# EAGLE board version0.1 (EAGLE 7.3.0)
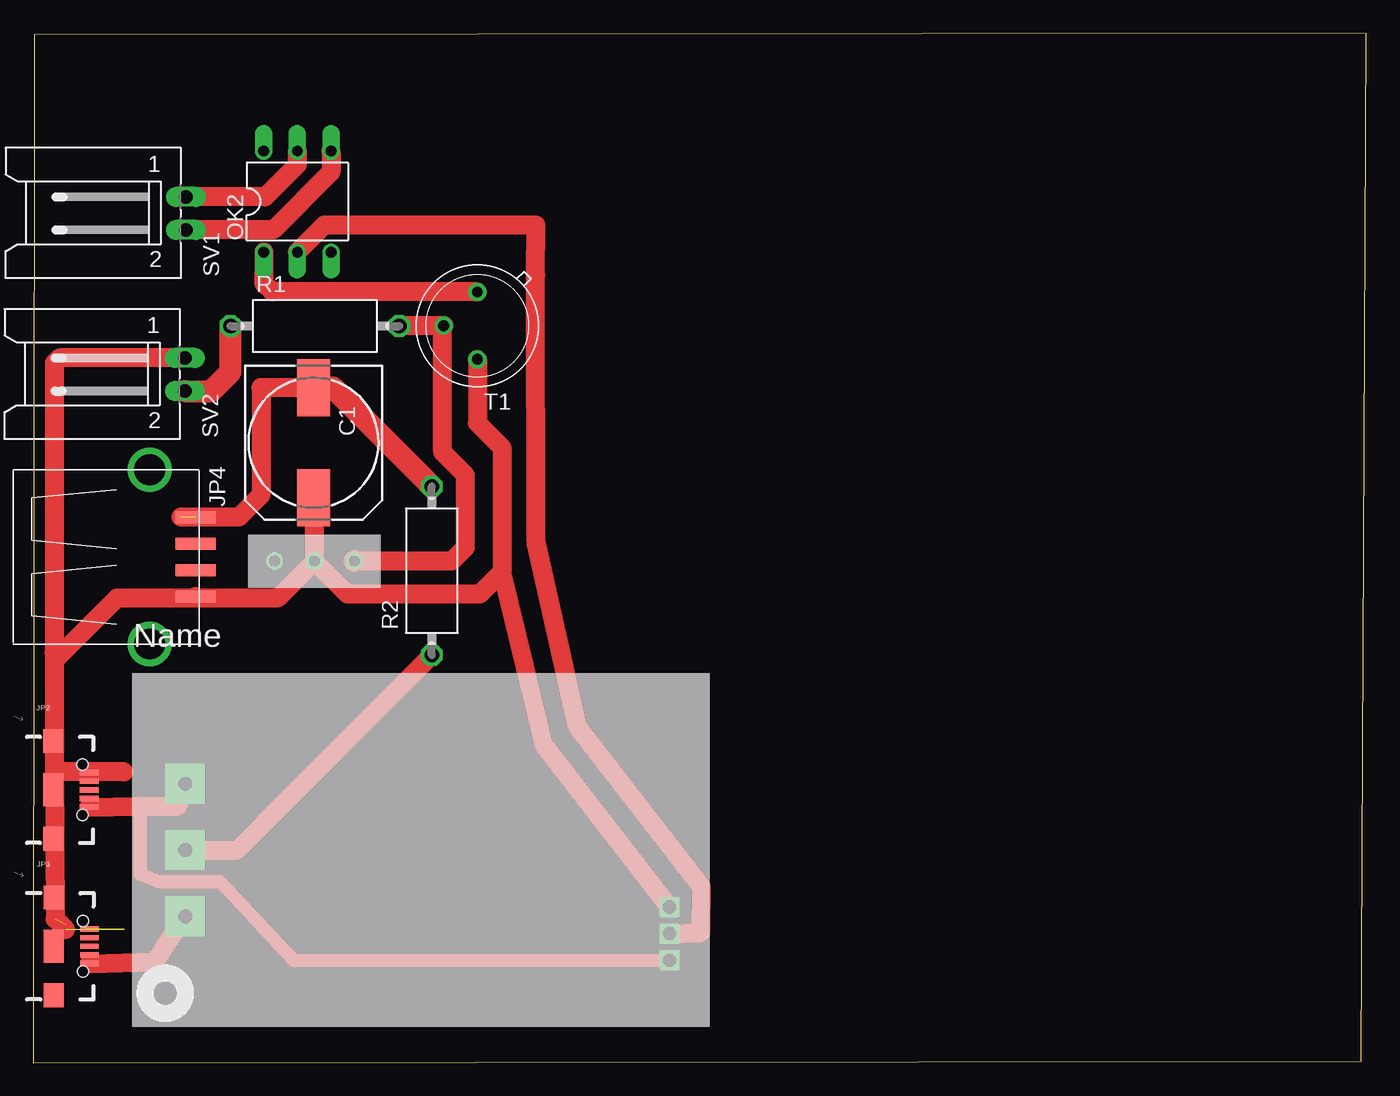
[diagram p0: board, top side]

Size 100.48 x 77.56 mm. Coordinates in mm from the lower left corner, seen from the top.
Outline: 0,0 100.1,0.1 100.48,77.56 0.08,77.46 0,0
Copper layers (1*16): Top 0.035mm / dielectric 1.5mm / Bottom 0.035mm
Design rules "default": minimum track width 10mil, minimum drill 24mil, track to track 8mil, track to pad 8mil, pad to pad 8mil, via to via 8mil, smd to smd 8mil, copper to edge 40mil, drill to drill 8mil, minimum pad ring 10mil, minimum via ring 8mil, stop-mask expansion 4mil, vias tented up to drill 0mil, thermal gap 10mil

## Footprints (pad centres in the part's own frame; a part is rotated, then mirrored left to right if it is on the bottom)
150CLZ-1014 = smd 4.3 x 2.5: + 4.15,0; - -4.15,0
USB-AB-MICRO-SMD_V03 = smd 1.4 x 0.4: D+1 2.7,0; D-1 2.7,0.65; GND1 2.7,-1.3; ID1 2.7,-0.65; VBUS1 2.7,1.3 | smd 1.5 x 1.8: SHIELD1 0,3.68; SHIELD3 0,-3.68 | smd 1.5 x 2.5: SHIELD2 0,0 | hole 0.85: 2.2,1.9; 2.2,-1.9
USB-A-S = smd 3 x 0.9: D+ 3.45,-1; D- 3.45,1; GND 3.45,-3; VBUS 3.45,3 | drill 2.311: P$5 0,-6.566; P$6 0,6.566
DIL06 = drill 0.813 offset: 1 -2.54,-3.81; 2 0,-3.81; 3 2.54,-3.81; 4 2.54,3.81; 5 0,3.81; 6 -2.54,3.81
VMTB60 = drill 1.1 octagon: 1 -6.35,0; 2 6.35,0
L02P = drill 1.016 long: 1 1.25,-6.25; 2 -1.25,-6.25
TO5 = drill 0.813 octagon: 1 0,-2.54; 2 2.54,0; 3 0,2.54
RELAY_BOARD = drill 1 pad 1.5 square: CTRL_GND 40.5,9; CTRL_IN 40.5,7; CTRL_VCC 40.5,5 | drill 1 pad 3 square: P$2 4,18.3; RELAY_BASE 4,13.3; RELAY_STD_ON 4,8.3
POT_TRIMMER = drill 0.8: IN 5,2; OUT1 2,2; OUT2 8,2

## Placement (x,y rotation side)
C1  [150CLZ-1014]  21.13,46.71 270 top
JP2  [USB-AB-MICRO-SMD_V03]  1.52,20.55 0 top
JP3  [USB-AB-MICRO-SMD_V03]  1.55,8.76 0 top
JP4  USB-A-S  [USB-A-S]  8.79,38.1 0 top
OK2  H11L1M  [DIL06]  19.91,64.87 0 top
R1  [VMTB60]  21.23,55.5 0 top
R2  [VMTB60]  30.05,37.06 90 top
SV1  [L02P]  5.26,63.98 90 top
SV2  [L02P]  5.18,51.84 90 top
T1  2N3440  [TO5]  33.48,55.52 180 top
U$1  RELAY_BOARD  [RELAY_BOARD]  7.47,2.72 0 top
U$5  POT_TRIMMER  [POT_TRIMMER]  16.21,35.79 0 top

## Library data of the parts
C1 = rcl
JP2 JP3 = SparkFun-Connectors; PROD_ID: CONN-11794
JP4 = SparkFun-Connectors
OK2 = optocoupler; MF: FAIRCHILD SEMICONDUCTOR; MPN: H11L1-M; OC_FARNELL: 1021127; OC_NEWARK: 72K8643
R1 R2 = resistor
SV1 SV2 = con-amp-mt; OC_FARNELL: unknown; OC_NEWARK: unknown
T1 = transistor
U$1 U$5 = MBLIB

## Nets
GND: C1.+ JP2.VBUS1 JP3.VBUS1 JP4.GND SV2.1 T1.3 U$1.CTRL_GND U$5.IN
N$1: R1.2 T1.2 U$5.OUT2
N$2: C1.- JP4.VBUS R2.2
N$3: OK2.2 U$1.CTRL_IN
N$4: JP2.GND1 U$1.CTRL_VCC U$1.P$2
N$5: R1.1 SV2.2
N$6: JP3.GND1 U$1.RELAY_STD_ON
N$7: OK2.5 SV1.1
N$8: OK2.1 T1.1
N$9: OK2.4 SV1.2
N$10: R2.1 U$1.RELAY_BASE
VCC: OK2.6

## Tracks (layer width: path | path; a pad name or v marks a point on that pad's centre or on a via)
GND  (4 unrouted)
  Top 1.016: 6.78,21.95 6.33,21.95 JP2.VBUS1
  Top 1.422: 21.21,42.56 C1.+ 21.21,42.49 U$5.IN | T1.3 33.48,48.18 35.33,46.33 35.33,36.98 | 35.33,36.98 33.65,35.31 23.69,35.31 U$5.IN | U$5.IN 18.42,35 12.19,35 | JP4.GND 12.19,35.05 12.19,35 | 12.19,35 6.3,35 1.65,30.35 1.6,31.04 | 6.83,21.89 6.78,21.95 2.06,21.95 1.6,22.33 | U$1.CTRL_GND 38.51,23.9 35.33,36.98 | SV2.1 1.99,53.09 1.6,52.7 1.6,31.04 | 1.6,22.33 1.65,10.82 2.44,10.03 | 1.6,31.04 1.6,22.33
N$1
  Top 1.422: R1.2 27.61,55.52 T1.2 30.86,55.45 30.86,45.97 32.59,44.25 32.59,38.81 31.57,37.8 U$5.OUT2
  Top 1.676: U$5.OUT2
N$2  (1 unrouted)
  Top 1.422: C1.- 17.17,50.86 17.17,42.77 15.49,41.1 11.13,41.1
  Top 1.676: C1.- 22.6,50.86 R2.2
N$3
  Top 1.422: U$1.CTRL_IN 50.33,9.79 50.37,13.23 41.05,25.3 37.92,39.24 37.87,59.36 37.9,63.09 21.95,63.09 OK2.2
N$4
  Top 1.016: U$1.CTRL_VCC 19.69,7.67 14.1,13.61 9.5,13.61 8.05,14.2 8.05,19.12 7.85,19.32
  Top 1.422: JP2.GND1 7.85,19.32 10.92,19.32 U$1.P$2
N$5
  Top 1.676: SV2.2 13.43,50.59 14.88,52.04 R1.1
N$6
  Top 1.422: 11.81,10.22 U$1.RELAY_STD_ON 9.21,7.62 JP3.GND1
N$7
  Top 1.422: OK2.5 19.91,67.67 17.48,65.23 SV1.1
N$8
  Top 1.422: T1.1 18.03,58.06 17.4,58.7 17.4,61.04 OK2.1
N$9
  Top 1.422: OK2.4 22.45,67.11 18.11,62.76 11.54,62.76 SV1.2
N$10
  Top 1.422: 30.05,30.66 R2.1 15.36,16.02 U$1.RELAY_BASE